# Altium PCB BrushlessDriver.PcbDoc (part 1 of 2)
Units mm, origin at the board's own origin, x right, y up, seen from the top; angles counter-clockwise.
Board outline 27.94 x 39.37 mm, 4 copper layers (Component Side, Ground Plane, Power Plane, Solder Side), stack 0.844 mm thick; 77 components, 59 nets, 274 pads, 183 vias.
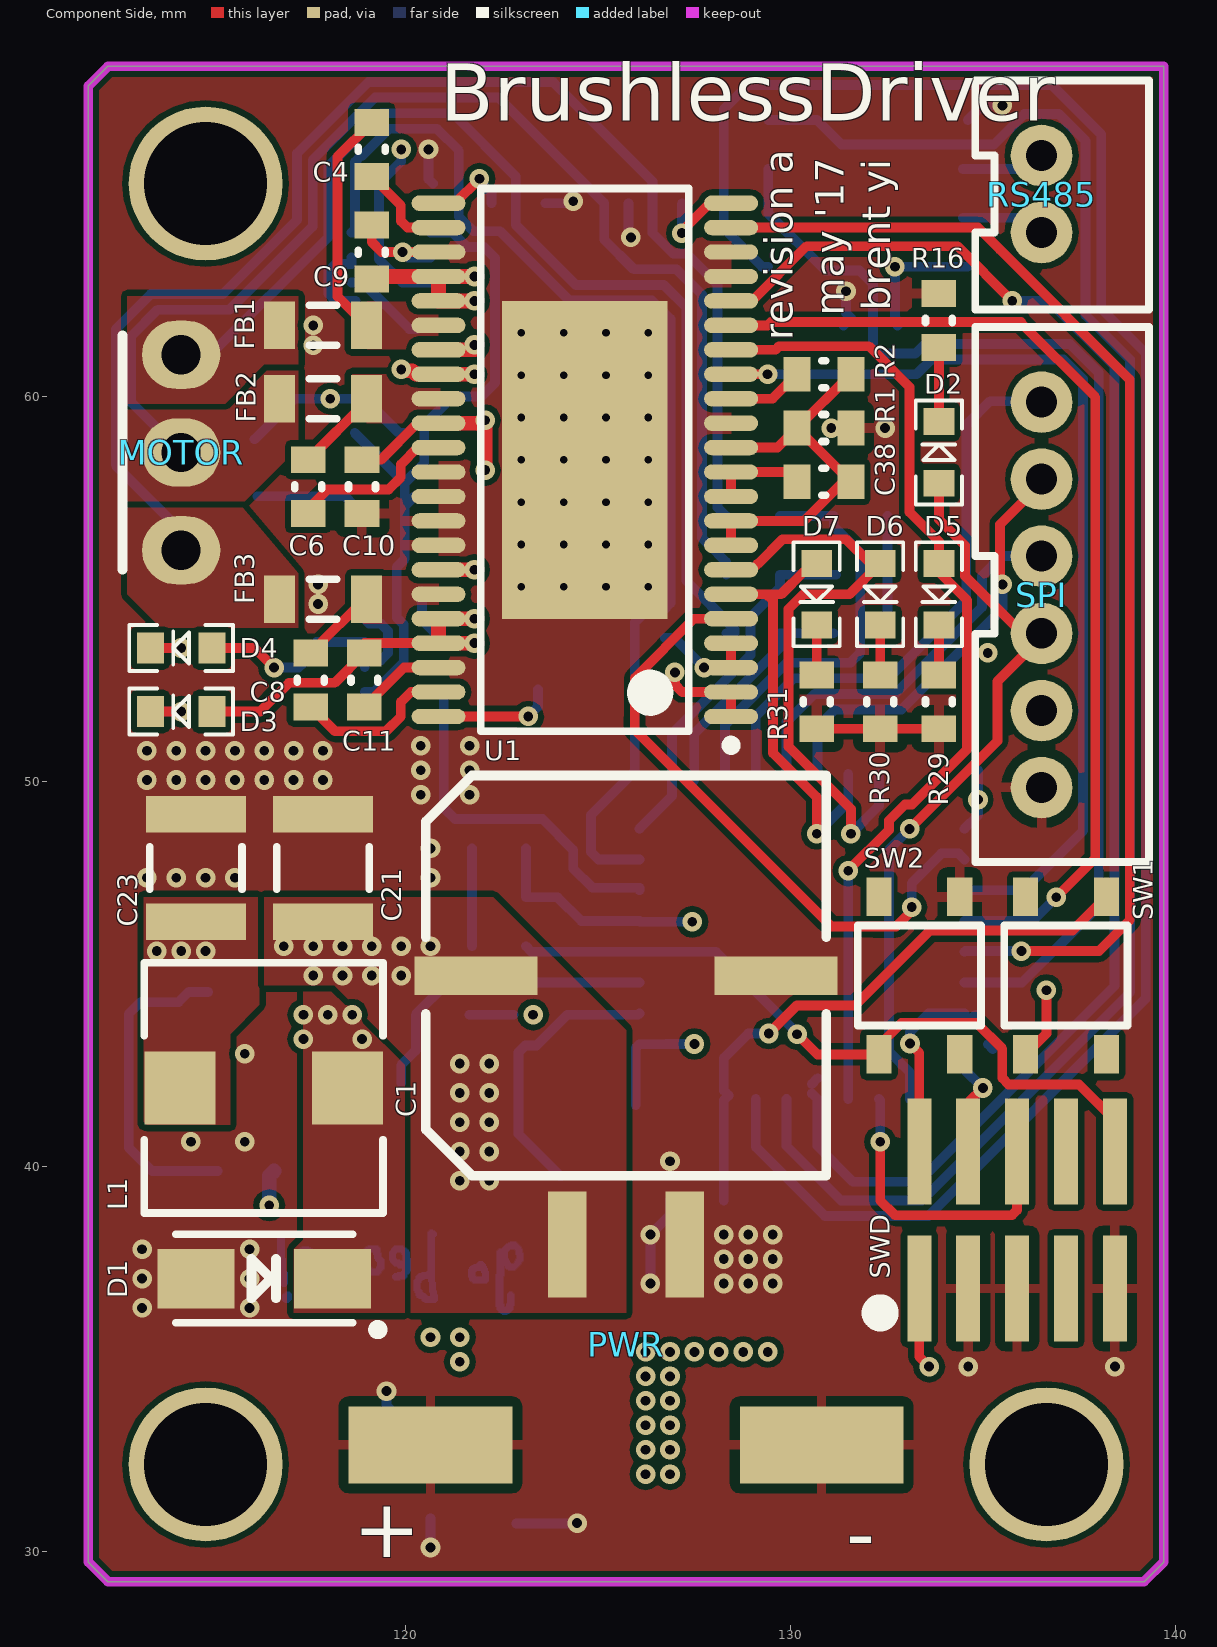
[diagram p0: Component Side view]
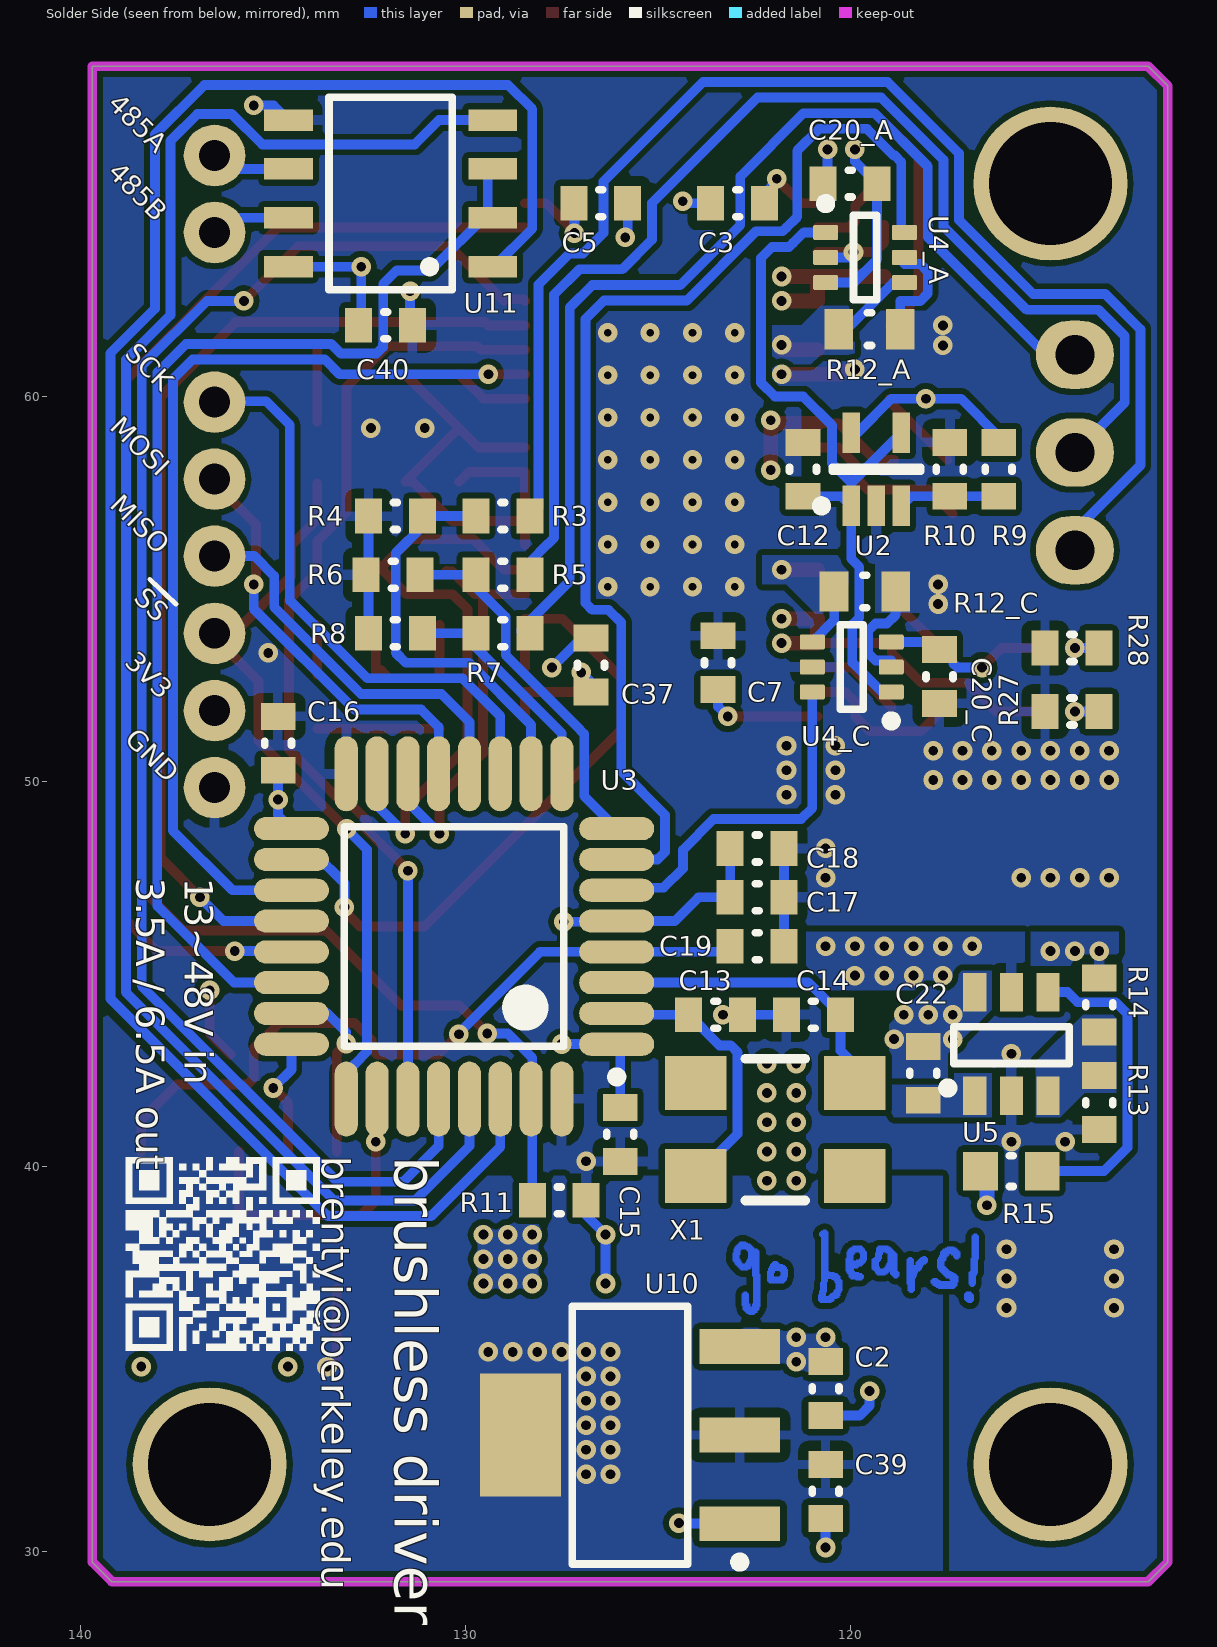
[diagram p1: Solder Side view, seen from below]
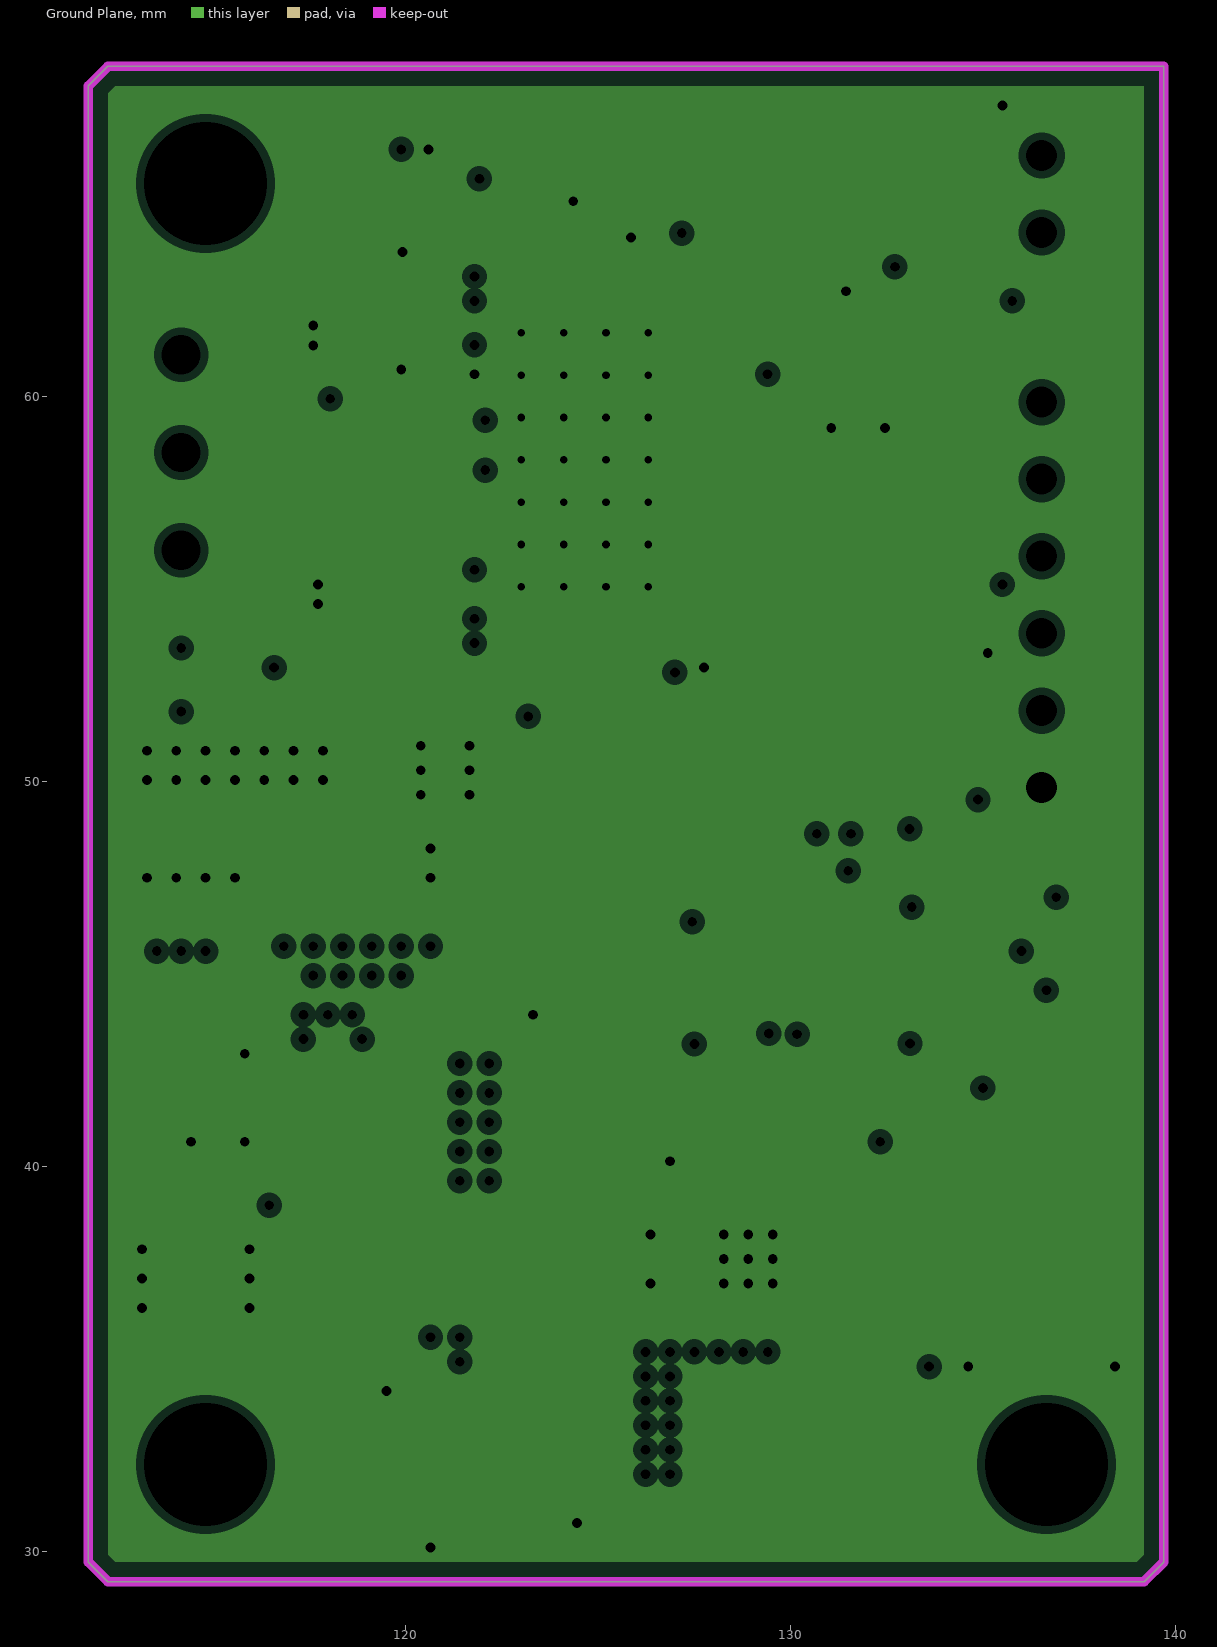
[diagram p2: Ground Plane, clearances drawn from the general rule]
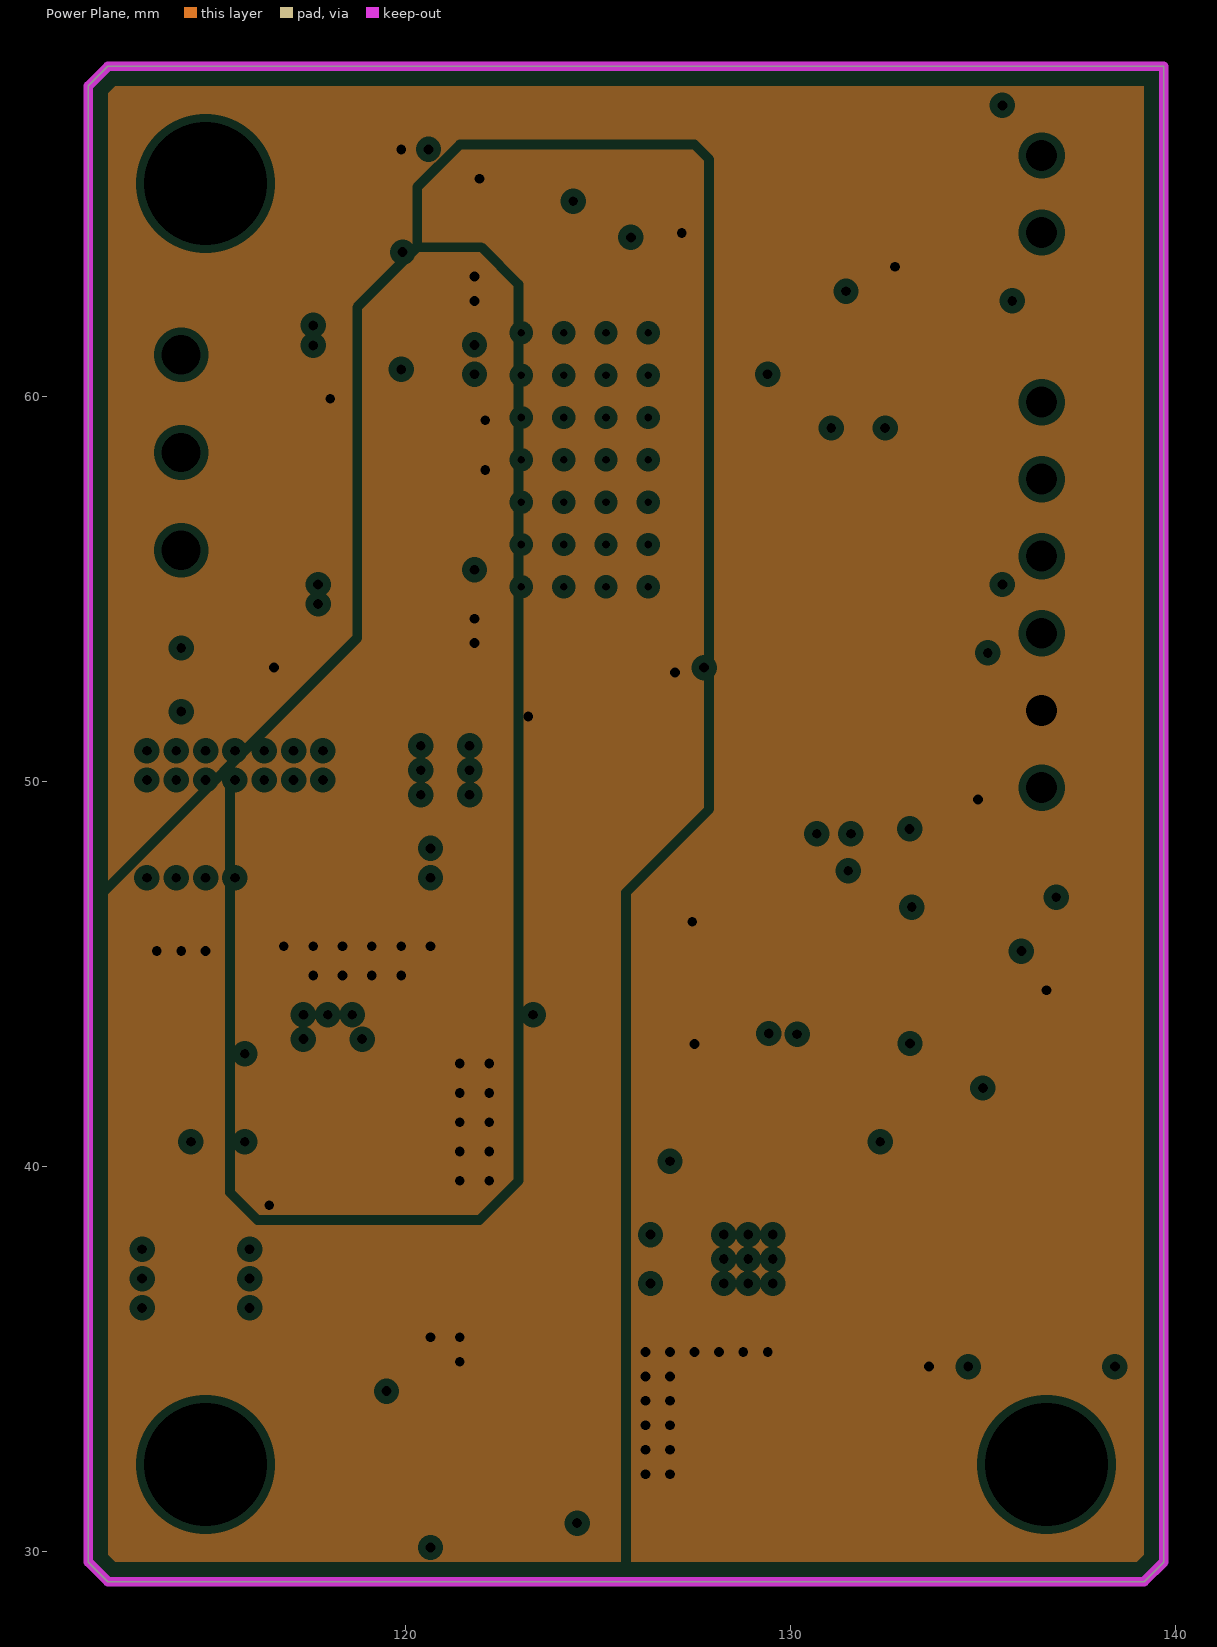
[diagram p3: Power Plane, clearances drawn from the general rule]
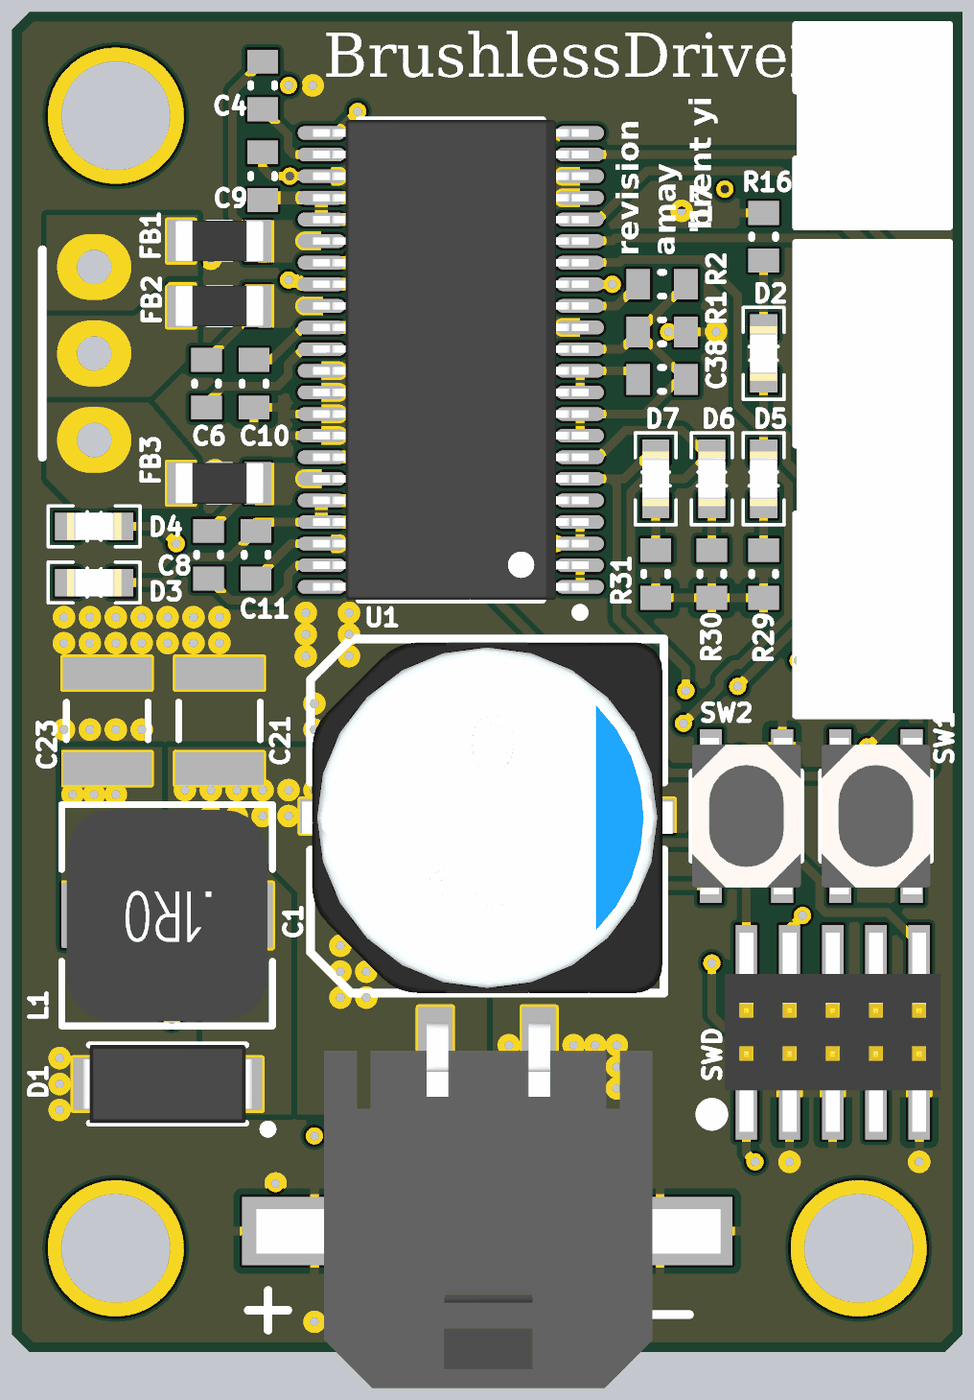
[diagram p5: 3D render of the assembled board from above, using the file's embedded part models]

## Layer stack, top to bottom
Top Solder: solder mask 0.0102, Solder Resist, Dk 3.5
Component Side: signal copper 0.0356
Dielectric 1: core 0.32, FR-4, Dk 4.8
Ground Plane: plane copper 0.036, net GND
Dielectric 3: prepreg 0.127, Dk 4.2
Power Plane: plane copper 0.036, net (Multiple Nets)
Dielectric 4: core 0.254, Dk 4.2
Solder Side: signal copper 0.0356
Bottom Solder: solder mask 0.0102, Solder Resist, Dk 3.5

## Board outline
111.76,29.718 112.268,29.21 139.192,29.21 139.7,29.718 139.7,68.58 112.268,68.58 111.76,68.072

## Design rules (kind name [scope] priority, off if disabled: settings)
Clearance [All] p1: gap=0.152 ignorepadtopadclearanceinfootprint=FALSE
PlaneClearance [All] p1: clearance=0.203
PlaneConnect [All] p1: planeconnectstyle=Direct reliefexpansion=0.508 reliefentries=4 reliefconductorwidth=0.254 reliefairgap=0.254
PolygonConnect PolygonConnectPWR [IsNamedPolygon('Power')] p1: connectstyle=Direct reliefconductorwidth=0.254 reliefentries=4 polygonreliefangle="90 Angle" airgapwidth=0.254
PolygonConnect PolygonConnectSTD [All] p2: thpad.connectstyle=Relief thpad.reliefconductorwidth=0.254 thpad.reliefentries=4 thpad.polygonreliefangle="90 Angle" thpad.airgapwidth=0.254 smdpad.connectstyle=Relief smdpad.reliefconductorwidth=0.254 smdpad.reliefentries=4 smdpad.polygonreliefangle="90 Angle" smdpad.airgapwidth=0.254 via.connectstyle=Direct via.reliefconductorwidth=0.254 via.reliefentries=4 via.polygonreliefangle="90 Angle" via.airgapwidth=0.254
RoomDefinition C [InComponentClass('C')] p1: confinementstyle=ConfineIn formatcopy=TRUE lockcomponents=FALSE outline 116.863,51.297 116.863,54.155 118.049,54.155 118.049,55.864 121.207,55.864 121.207,54.453 121.698,54.453 121.698,51.07 118.24,51.07 118.24,51.297
RoomDefinition A [InComponentClass('A')] p2: confinementstyle=ConfineIn formatcopy=TRUE lockcomponents=FALSE outline 117.896,62.133 117.896,65.516 118.586,65.516 118.586,66.361 121.444,66.361 121.444,64.703 121.354,64.703 121.354,62.133 121.088,62.133 121.088,60.823 117.93,60.823 117.93,62.133
RoomDefinition U_RS485 [InComponentClass('U_RS485')] p3: confinementstyle=ConfineIn formatcopy=TRUE lockcomponents=FALSE outline 128.498,62.424 128.498,68.132 135.408,68.132 135.408,62.424 133.509,62.424 133.509,61.02 130.651,61.02 130.651,62.424
RoomDefinition U_MCU [InComponentClass('U_MCU')] p4: confinementstyle=ConfineIn formatcopy=TRUE lockcomponents=FALSE outline 118.758,38.722 118.758,43.193 119.537,43.193 119.537,44.771 120.999,44.771 120.999,49.089 124.323,49.089 124.323,51.953 134.045,51.953 134.045,52.421 135.703,52.421 135.703,51.953 136.281,51.953 136.281,47.838 139.114,47.838 139.114,42.078 136.281,42.078 136.281,39.995 128.999,39.995 128.999,38.287 126.141,38.287 126.141,38.722
RoomDefinition U_CurrentSenseAmpBias [InComponentClass('U_CurrentSenseAmpBias')] p5: confinementstyle=ConfineIn formatcopy=TRUE lockcomponents=FALSE outline 115.327,56.681 115.327,59.539 117.402,59.539 117.402,60.364 121.26,60.364 121.26,59.539 122.065,59.539 122.065,56.681 121.26,56.681 121.26,55.856 117.402,55.856 117.402,56.681 116.597,56.681
RoomDefinition U_3V3_StepDown [InComponentClass('U_3V3_StepDown')] p6: confinementstyle=ConfineIn formatcopy=TRUE lockcomponents=FALSE outline 119.821,30.129 119.821,35.657 121.451,35.657 121.451,36.749 130.009,36.749 130.009,29.216 121.451,29.216 121.451,30.129
RoomDefinition U_Driver [InComponentClass('U_Driver')] p7: confinementstyle=ConfineIn formatcopy=TRUE lockcomponents=FALSE outline 115.927,53.708 115.927,62.878 118.297,62.878 118.297,67.85 119.955,67.85 119.955,65.935 129.688,65.935 129.688,61.408 132.301,61.408 132.301,57.725 133.255,57.725 133.255,56.518 134.762,56.518 134.762,53.21 134.687,53.21 134.687,50.641 129.688,50.641 129.688,50.435 119.63,50.435 119.63,51.205 118.105,51.205 116.708,51.205 116.708,53.708
RoomDefinition U_12V_Buck [InComponentClass('U_12V_Buck')] p8: confinementstyle=ConfineIn formatcopy=TRUE lockcomponents=FALSE outline 112.162,38.236 112.162,45.844 112.875,45.844 112.875,50.031 119.56,50.031 119.56,45.844 120.47,45.844 120.47,38.236 119.786,38.236 119.786,35.255 113.003,35.255 113.003,38.236
RoutingVias [All] p1: holewidth=0.254 width=0.508 viastyle="Through Hole" minholewidth=0.254 minwidth=0.508 maxholewidth=0.254 maxwidth=0.508
SolderMaskExpansion SolderMaskExpansionVia [IsVia] p1: expansion=0.025 soldermaskfromhole=TRUE
SolderMaskExpansion [All] p2: expansion=0.076
Width [All] p1: maxlimit=1.27 minlimit=0.254 preferedwidth=0.254
28 further rules are at their usual default settings.

## Classes and differential pairs
component class U_RS485: C40 U11
component class U_3V3_StepDown: C2 C39 U10
component class BrushlessDriver: C1 D2 D3 D4 MOTOR PWR R16 R27 R28 RS485 SPI SWD
component class A: C20_A R12_A U4_A
component class C: C20_C R12_C U4_C
component class U_12V_Buck: C21 C22 C23 D1 L1 R13 R14 R15 U5
component class U_Driver: C3 C4 C5 C6 C7 C8 C9 C10 C11 C37 C38 D5 D6 D7 FB1 FB2 FB3 R1 R2 R3 R4 R5 R6 R7 R8 R29 R30 R31 U1
component class U_MCU: C13 C14 C15 C16 C17 C18 C19 R11 SW1 SW2 U3 X1
channel class CurrentSenseLowSide: A C
component class U_CurrentSenseAmpBias: C12 R9 R10 U2

## Components (designator, comment, footprint, x,y, rotation, side; value= is the part's Value field where it differs from the comment)
C1 "100uF 63V" CAP-ELECTROLYTIC[10.0x12.6] 125.73,44.958 r90 top value=100uF
C2 "10uF" CAPC0603(1608)100_L 120.65,34.228 r90 bottom
C3 "2.2uF" CAPC0603(1608)100_L 122.936,65.024 r0 bottom
C4 "0.1uF" CAPC0603(1608)100_L 119.126,66.421 r90 top value=100nF
C5 "2.2uF" CAPC0603(1608)100_L 126.492,65.024 r180 bottom
C6 "0.1uF" CAPC0603(1608)100_L 117.475,57.658 r90 top value=100nF
C7 "2.2uF" CAPC0603(1608)100_L 123.444,53.086 r90 bottom
C8 "0.1uF" CAPC0603(1608)100_L 117.537,52.634 r90 top value=100nF
C9 "0.1uF" CAPC0603(1608)100_L 119.126,63.754 r90 top value=100nF
C10 "0.1uF" CAPC0603(1608)100_L 118.872,57.658 r270 top value=100nF
C11 "0.1uF" CAPC0603(1608)100_L 118.934,52.634 r270 top value=100nF
C12 "0.1uF" CAPC0603(1608)100_L 121.236,58.11 r270 bottom value=100nF
C13 "15pF" CAPC0603(1608)100_L 123.506,43.942 r180 bottom
C14 "15pF" CAPC0603(1608)100_L 120.966,43.942 r0 bottom
C15 "0.1uF" CAPC0603(1608)100_L 125.984,40.832 r90 bottom value=100nF
C16 "0.1uF" CAPC0603(1608)100_L 134.874,50.992 r270 bottom value=100nF
C17 "0.1uF" CAPC0603(1608)100_L 122.428,46.99 r0 bottom value=100nF
C18 "2.2uF" CAPC0603(1608)100_L 122.428,48.26 r180 bottom
C19 "0.1uF" CAPC0603(1608)100_L 122.428,45.72 r0 bottom value=100nF
C20_A "0.1uF" CAPC0603(1608)100_L 120.015,65.532 r0 bottom value=100nF (schematic designator C20)
C20_C "0.1uF" CAPC0603(1608)100_L 117.692,52.726 r270 bottom value=100nF (schematic designator C20)
C21 "4.7uF" CAPC1210(3225)280_L 117.856,47.752 r270 top
C22 "0.1uF" CAPC0603(1608)100_L 118.11,42.418 r90 bottom value=100nF
C23 "22uF" CAPC1210(3225)210_L 114.554,47.752 r270 top
C37 "0.1uF" CAPC0603(1608)100_L 126.746,53.024 r90 bottom value=100nF
C38 "0.1uF" CAPC0603(1608)100_L 130.872,57.785 r0 top value=100nF
C39 "10uF" CAPC0603(1608)100_L 120.65,31.558 r90 bottom
C40 "0.1uF" CAPC0603(1608)100_L 132.08,61.849 r0 bottom value=100nF
D1 "B160-13-F" DO-214AC 116.332,37.084 r180 top
D2 "LED_0603_GREEN_5mA" LED0603 133.858,58.547 r90 top
D3 "LED_0603_ORANGE_5mA" LED0603 114.173,51.816 r180 top
D4 "LED_0603_GREEN_5mA" LED0603 114.173,53.467 r180 top
D5 "LED_0603_BLUE_5mA" LED0603 133.858,54.864 r270 top
D6 "LED_0603_BLUE_5mA" LED0603 132.334,54.864 r270 top
D7 "LED_0603_BLUE_5mA" LED0603 130.683,54.864 r270 top
FB1 "MPZ2012S300A" 0805-Ferrite 117.856,61.849 r180 top
FB2 "MPZ2012S300A" 0805-Ferrite 117.856,59.944 r180 top
FB3 "MPZ2012S300A" 0805-Ferrite 117.856,54.737 r180 top
L1 "100uH" WE-PD-XS-PB 116.316,42.04 r180 top
MOTOR "MotorConnector" MOTORCONNECTOR 114.173,61.087 r270 top
PWR "MOLEX_MICROFIT_2_SMD_HORZ" MOLEX-MICROFIT-2-SMD-HORZ 125.73,33.147 r0 top
R1 "1R" RESC0603(1608)_L 130.872,59.182 r0 top value="1.00 Ohm"
R2 "39K" RESC0603(1608)_L 130.872,60.579 r0 top value="39000.00 Ohm"
R3 "39K" RESC0603(1608)_L 129.032,56.896 r180 bottom value="39000.00 Ohm"
R4 "2K4" RESC0603(1608)_L 131.826,56.896 r180 bottom value="2400.00 Ohm"
R5 "39K" RESC0603(1608)_L 129.032,55.372 r180 bottom value="39000.00 Ohm"
R6 "2K4" RESC0603(1608)_L 131.888,55.372 r180 bottom value="2400.00 Ohm"
R7 "39K" RESC0603(1608)_L 129.032,53.848 r180 bottom value="39000.00 Ohm"
R8 "2K4" RESC0603(1608)_L 131.826,53.848 r180 bottom value="2400.00 Ohm"
R9 "39K" RESC0603(1608)_L 116.156,58.11 r90 bottom value="39000.00 Ohm"
R10 "39K" RESC0603(1608)_L 117.426,58.11 r270 bottom value="39000.00 Ohm"
R11 "10K" RESC0603(1608)_L 127.57,39.116 r0 bottom value="10000.00 Ohm"
R12_A "0.002" 0805-SHUNT 119.509,61.752 r0 bottom (schematic designator R12)
R12_C "0.002" 0805-SHUNT 119.628,54.935 r0 bottom (schematic designator R12)
R13 "2K8" RESC0603(1608)_L 113.538,41.656 r90 bottom value="2800.00 Ohm"
R14 "39K" RESC0603(1608)_L 113.538,44.196 r90 bottom value="39000.00 Ohm"
R15 "100K" RESC0603(1608)_N 115.824,39.878 r0 bottom value="100000.00 Ohm"
R16 "150" RESC0603(1608)_L 133.858,61.976 r270 top value="150.00 Ohm"
R27 "10K" RESC0603(1608)_L 114.249,51.816 r0 bottom value="10000.00 Ohm"
R28 "150" RESC0603(1608)_L 114.249,53.467 r180 bottom value="150.00 Ohm"
R29 "150" RESC0603(1608)_L 133.858,52.07 r90 top value="150.00 Ohm"
R30 "150" RESC0603(1608)_L 132.334,52.07 r90 top value="150.00 Ohm"
R31 "150" RESC0603(1608)_L 130.683,52.07 r90 top value="150.00 Ohm"
RS485 "JST_PH_2_VERT" JST-PH-2-PTH-VERT 136.525,65.262 r270 top
SPI "JST_PH_6_VERT" JST-PH-6-PTH-VERT 136.525,54.855 r270 top
SW1 "BOOT" SWITCH 137.16,44.958 r270 top
SW2 "RESET" SWITCH 133.35,44.958 r90 top
SWD "1.27mm SWD Connector" SWD-SMD 135.89,38.608 r90 top
U1 "DRV8312" HTSSOP-44E 124.659,58.356 r180 top
U2 "MCP6001T-I/LT" SC70-LT5_M 119.331,58.11 r90 bottom
U3 "STM32F303K8T6" STM-LQFP32_M 130.302,45.974 r0 bottom
U4_A "INA199A2DCKT" DCK0006A_L 119.625,63.612 r180 bottom (schematic designator U4)
U4_C "INA199A2DCKT" DCK0006A_L 119.969,52.974 r0 bottom (schematic designator U4)
U5 "MP2459" TSOT23-6 115.824,43.18 r90 bottom
U10 "LD1117S33TR" SOT-223_L 125.73,33.02 r0 bottom
U11 "ST3485ECDR" SOIC-8 131.953,65.278 r0 bottom
X1 "8Mhz, 10pF" ABRA-ABM3B-4_V 121.958,40.957 r0 bottom

## Footprints (in the part's own frame and the unit in brackets; to place one, negate y for a bottom-side part, rotate by r counter-clockwise, add the part's x,y. Pads: shape width x height; smd on the part's side, far side on the other; paste and mask are expansions set on the pad)
0805-Ferrite [mm] "Chip Inductor, 2-Leads, Body 2.60x1.20mm, IPC High Density"
  rect 0.8x1.24 smd: 1(-1.13,0) 2(1.13,0)
  silkscreen extent -0.35,-0.52 0.35,0.52, body extent -1.3,-0.6 1.3,0.6, height 0.6
0805-SHUNT [mm] "Chip Resistor, 2-Leads, Body 2.00x1.10mm, IPC High Density"
  rect 0.75x1.05 smd: 1(-0.8,0) 2(0.8,0)
  silkscreen extent -0.05,-0.43 0.05,0.43, body extent -1,-0.55 1,0.55, height 0.32
ABRA-ABM3B-4_V [mil] "SMT Crystal, 4-Leads, Body 5.2x3.4mm"
  rect 63x55 smd: 1(-81.5,-47.5) 2(-81.5,47.5) 2(81.5,-47.5) 3(81.5,47.5)
  silkscreen extent -30,-72 30,72, body extent -114,-52 113,51, height 39
CAP-ELECTROLYTIC[10.0x12.6] [mm]
  rect 1x3.2 smd: 1(0,3.9) 2(0,-3.9)
  silkscreen extent -5.2,-5.2 5.2,5.2, body extent -5.2,-5.45 5.1,5.45, height 10.2
CAPC0603(1608)100_L [mm] "Chip Capacitor, Body 1.6x0.8mm, Height 1.0mm, IPC High Density"
  rect 0.7x0.9 smd: 1(-0.7,0) 2(0.7,0)
  silkscreen extent -0.05,-0.35 0.05,0.35, body extent -0.87,-0.47 0.88,0.48, height 1
CAPC1210(3225)210_L [mm] "Chip Capacitor, Body 3.2x2.5mm, Height 2.1mm, IPC High Density"
  rect 0.95x2.6 smd: 1(-1.4,0) 2(1.4,0)
  silkscreen extent -0.55,-1.2 0.55,1.2, body extent -1.7,-1.35 1.7,1.35, height 2.1
CAPC1210(3225)280_L [mm] "Chip Capacitor, Body 3.2x2.5mm, Height 2.8mm, IPC High Density"
  rect 0.95x2.6 smd: 1(-1.4,0) 2(1.4,0)
  silkscreen extent -0.55,-1.2 0.55,1.2, body extent -1.7,-1.4 1.7,1.4, height 2.8
DCK0006A_L [mm] "SOT23, 6-Leads, Body 2.15x1.4mm, Pitch 0.65mm, IPC High Density"
  rrect25% 0.65x0.4 smd: 1(-1.025,0.65) 2(-1.025,0) 3(-1.025,-0.65) 4(1.025,-0.65) 5(1.025,0) 6(1.025,0.65)
  silkscreen extent -1.15,-1.1 0.3,1.52, body extent -1.14,-1 1.14,1, height 0.94
DO-214AC [mm] "Molded Diode, 2-Leads, Body 4.30x2.15mm, IPC Medium Density"
  rect 2x1.55 smd: 1(-1.778,0) 2(1.778,0)
  silkscreen extent -3.08,-1.15 2.3,1.45, body extent -2.52,-1.14 2.52,1.15, height 2.3
HTSSOP-44E [mm] "TSOP, 44-Leads, Body 14.00x6.10mm, Pitch 0.64mm, Thermal Pad 8.26x4.31mm, IPC Medium Density"
  oval 1.4x0.4 smd: 1(-3.8,6.667) 2(-3.8,6.032) 3(-3.8,5.397) 4(-3.8,4.762) 5(-3.8,4.127) 6(-3.8,3.492) 7(-3.8,2.857) 8(-3.8,2.222) 9(-3.8,1.587) 10(-3.8,0.952) 11(-3.8,0.317) 12(-3.8,-0.318) 13(-3.8,-0.953) 14(-3.8,-1.588) 15(-3.8,-2.223) 16(-3.8,-2.858) 17(-3.8,-3.493) 18(-3.8,-4.128) 19(-3.8,-4.763) 20(-3.8,-5.398) 21(-3.8,-6.033) 22(-3.8,-6.667) 23(3.8,-6.667) 24(3.8,-6.032) 25(3.8,-5.397) 26(3.8,-4.762) 27(3.8,-4.127) 28(3.8,-3.492) 29(3.8,-2.857) 30(3.8,-2.222) 31(3.8,-1.587) 32(3.8,-0.952) 33(3.8,-0.317) 34(3.8,0.318) 35(3.8,0.953) 36(3.8,1.588) 37(3.8,2.223) 38(3.8,2.858) 39(3.8,3.493) 40(3.8,4.128) 41(3.8,4.763) 42(3.8,5.398) 43(3.8,6.033) 44(3.8,6.667)
  rect 4.31x8.26 smd: 45(0,0)
  silkscreen extent -3.93,-7.05 2.7,7.54, body extent -4.05,-7.05 4.05,7.05, height 1.2
JST-PH-2-PTH-VERT [mm]
  round 1.6 hole 0.8: 1(-1,0) 2(1,0)
  silkscreen extent -2.95,-1.72 3,2.79, body extent -2.95,-1.7 2.95,2.8, height 6
JST-PH-6-PTH-VERT [mil]
  round 63 hole 31.5: 1(-196.85,0) 2(-118.11,0) 3(-39.37,0) 4(39.63,0) 5(118.63,0) 6(197.37,0)
  silkscreen extent -274,-68 274,110, body extent -274,-67 274,110, height 236
LED0603 [mm]
  rect 0.7x0.8 smd: A(-0.8,0) C(0.8,0)
  silkscreen extent -1.35,-0.6 1.35,0.6, body extent -0.8,-0.4 0.8,0.4, height 0.75
MOLEX-MICROFIT-2-SMD-HORZ [mm] "Micro-Fit 3.0™ Right Angle Header, 3.00mm Pitch, Single Row, 2 Circuits, with Solder Tab, Tin, Glow Wire Capable, Black"
  rect 4.25x2 smd: 0(-5.08,-0.381) 0(5.08,-0.381)
  rect 1x2.75 smd: 1(1.524,4.826) 2(-1.524,4.826)
  body extent -6.79,-4.99 6.86,5.75, height 5.64
MOTORCONNECTOR [mil]
  oval 70x80 hole 40: 1(0,0) 2(100,0) 3(200,0)
  silkscreen extent -20,-60 220,-60
RESC0603(1608)_L [mm] "Chip Resistor, Body 1.6x0.8mm, IPC High Density"
  rect 0.7x0.9 smd: 1(-0.7,0) 2(0.7,0)
  silkscreen extent -0.05,-0.35 0.05,0.35, body extent -0.85,-0.47 0.85,0.47, height 0.6
RESC0603(1608)_N [mm] "Chip Resistor, Body 1.6x0.8mm, IPC Medium Density"
  rect 0.9x1 smd: 1(-0.8,0) 2(0.8,0)
  silkscreen extent -0.05,-0.4 0.05,0.4, body extent -0.85,-0.47 0.85,0.47, height 0.6
SC70-LT5_M [mm] "SOT353, 5-Leads, Body 2x1.3mm, Pitch 0.65mm, Lead Span 2.1mm, IPC Low Density"
  rect 1.05x0.45 smd: 1(-0.95,0.65) 2(-0.95,0) 3(-0.95,-0.65) 4(0.95,-0.65) 5(0.95,0.65)
  silkscreen extent -1.07,-1.15 0.05,1.55, body extent -0.67,-1.12 0.68,1.13, height 1.1
SOIC-8 [mm] "SOIC, 8-Leads, Body 4.90x3.90mm, Pitch 1.27mm, IPC Medium Density"
  rect 1.27x0.56 smd: 1(-2.655,1.905) 2(-2.655,0.635) 3(-2.655,-0.635) 4(-2.655,-1.905) 5(2.654,-1.905) 6(2.654,-0.635) 7(2.654,0.635) 8(2.654,1.905)
  silkscreen extent -1.6,-2.5 1.6,2.5, body extent -3.1,-2.51 3.1,2.49, height 1.75
SOT-223_L [mm] "SOT223, 4-Leads, Body 6.5x3.5mm, Pitch 2.3mm, Lead Span 7mm, IPC High Density"
  rect 2.1x0.9 smd: 1(-2.85,2.3) 2(-2.85,0) 3(-2.85,-2.3)
  rect 2.1x3.2 smd: 4(2.85,0)
  silkscreen extent -2.97,-3.35 1.5,3.42, body extent -1.85,-3.35 1.85,3.35, height 1.8
STM-LQFP32_M [mm] "QFP, 32-Leads, Body 7x7mm, Pitch 0.8mm, IPC Low Density"
  oval 1.95x0.6 smd: 1(-4.225,2.8) 2(-4.225,2) 3(-4.225,1.2) 4(-4.225,0.4) 5(-4.225,-0.4) 6(-4.225,-1.2) 7(-4.225,-2) 8(-4.225,-2.8) 17(4.225,-2.8) 18(4.225,-2) 19(4.225,-1.2) 20(4.225,-0.4) 21(4.225,0.4) 22(4.225,1.2) 23(4.225,2) 24(4.225,2.8)
  oval 0.6x1.95 smd: 9(-2.8,-4.225) 10(-2,-4.225) 11(-1.2,-4.225) 12(-0.4,-4.225) 13(0.4,-4.225) 14(1.2,-4.225) 15(2,-4.225) 16(2.8,-4.225) 25(2.8,4.225) 26(2,4.225) 27(1.2,4.225) 28(0.4,4.225) 29(-0.4,4.225) 30(-1.2,4.225) 31(-2,4.225) 32(-2.8,4.225)
  silkscreen extent -4.35,-2.85 2.85,3.77, body extent -3.5,-3.5 3.5,3.5, height 1.6
SWD-SMD [mm]
  rect 2.75x0.625 smd: 1(-1.778,2.54) 2(1.778,2.54) 3(-1.778,1.27) 4(1.778,1.27) 5(-1.778,0) 6(1.778,0) 7(-1.778,-1.27) 8(1.778,-1.27) 9(-1.778,-2.54) 10(1.778,-2.54)
  silkscreen extent -2.51,3.46 -2.31,3.66, body extent -2.92,-3.17 2.92,3.18, height 5.96
SWITCH [mm]
  rect 1x0.65 smd: 1(-2.05,1.05) 2(2.05,1.05) 3(-2.05,-1.05) 4(2.05,-1.05)
  silkscreen extent -1.3,-1.6 1.3,1.6, body extent -2.3,-1.6 2.3,1.6, height 2.5
TSOT23-6 [mm] "SOT23, 6-Leads, Body 2.90x2.80mm, Pitch 0.95mm, IPC Medium Density"
  rect 1x0.6 smd: 1(-1.35,0.95) 2(-1.35,0) 3(-1.35,-0.95) 4(1.35,-0.95) 5(1.35,0) 6(1.35,0.95)
  silkscreen extent -1.27,-1.5 0.45,1.78, body extent -1.5,-1.5 1.5,1.5, height 1
WE-PD-XS-PB [mm] "SMD Inductor, 2-Leads, Body 5.9 x 6.2 mm"
  rect 1.85x1.9 smd: 1(-2.175,0) 2(2.175,0)
  silkscreen extent -3.1,-3.25 3.1,3.25, body extent -2.95,-3.1 2.95,3.1, height 3.29

## Part data
C1: library part CAP_100uF_63V_20%, "100uF 63V 20%", Manufacturer=Nichicon, PartNumber=PCR1J101MCL1GS, Tolerance=20%, Voltage=63V, Mounting Technology="Surface Mount", PackageDescription=10x12.7mm, PackageReference=1H
C2 C39: library part CMP-1035-02797-1, "CAP 10uF 6.3V ±20% 0603 (1608 Metric) Thickness 1mm SMD", Case-EIA=0603, Case-Metric=1608, Rated Voltage="6.3 V", Tolerance=±20%, Max Thickness="1 mm", Technology=SMT
C3 C5 C7 C18: library part CMP-1035-02767-1, "CAP 2.2uF 25V ±10% 0603 (1608 Metric) Thickness 1mm SMD", Case-EIA=0603, Case-Metric=1608, Rated Voltage="25 V", Tolerance=±10%, Max Thickness="1 mm", Technology=SMT
C4 C6 C8 C9 C10 C11 C12 C15 C16 C17 C19 C20_A C20_C C22 C37 C38 C40: library part CMP-1035-02595-1, "CAP 100nF 100V ±10% 0603 (1608 Metric) Thickness 1mm SMD", Case-EIA=0603, Case-Metric=1608, Rated Voltage="100 V", Tolerance=±10%, Max Thickness="1 mm", Technology=SMT
C13 C14: library part CMP-1035-00674-1, "CAP 15pF 25V ±1% 0603 (1608 Metric) Thickness 1mm SMD", Case-EIA=0603, Case-Metric=1608, Rated Voltage="25 V", Tolerance=±1%, Max Thickness="1 mm", Technology=SMT
C21: library part CMP-1038-02163-1, "CAP 4.7uF 50V ±20% 1210 (3225 Metric) Thickness 2.8mm SMD", Case-EIA=1210, Case-Metric=3225, Rated Voltage="50 V", Tolerance=±20%, Max Thickness="2.8 mm", Technology=SMT
C23: library part CMP-1038-02278-1, "CAP 22uF 16V ±20% 1210 (3225 Metric) Thickness 2.05mm SMD", Case-EIA=1210, Case-Metric=3225, Rated Voltage="16 V", Tolerance=±20%, Max Thickness="2.05 mm", Technology=SMT
D2 D4: Manufacturer="Lite-On Inc.", PartNumber=LTST-C193TGKT-5A, Mounting Technology="Surface Mount", PackageDescription="0603 (1608 Metric)", PackageReference=0603
D3: Manufacturer="Lite-On Inc.", PartNumber=LTST-C193KFKT-5A, Mounting Technology="Surface Mount", PackageDescription="0603 (1608 Metric)", PackageReference=0603
D5 D6 D7: Manufacturer="Lite-On Inc.", PartNumber=LTST-C193TBKT-5A, Mounting Technology="Surface Mount", PackageDescription="0603 (1608 Metric)", PackageReference=0603
L1: library part CMP-0227-00265-1, "SMD-Shielded Power Inductor WE-PD, L = 100 µH", Inductance="100 µH", ComponentLink1Description="Manufacturer Link", ComponentLink1URL=http://www.we-online.com, ComponentLink2Description=Datasheet, ComponentLink2URL=http://www.we-online.de/katalog/media/pdf/744778520.pdf, DatasheetVersion="ver 2, Oct-2004", PackageDescription="SMD Inductor, 2-Leads, Body 5.9 x 6.2 mm", PackageReference=WE-PD-XS-PB, PackageVersion=2004
PWR: Manufacturer=Molex, PartNumber=43650-0212, Mounting Technology="Surface Mount", PackageReference=Microfit-3.0mm
R1: library part CMP-1012-00002-1, "1R 0.1W 5% 0603 (1608 Metric)  SMD", Case-EIA=0603, Case-Metric=1608, Power="0.1 W", Tolerance="5 %", Technology=SMT
R2 R3 R5 R7 R9 R10 R14: library part CMP-1012-00689-1, "39K 0.1W 1% 0603 (1608 Metric)  SMD", Case-EIA=0603, Case-Metric=1608, Power="0.1 W", Tolerance="1 %", Technology=SMT
R4 R6 R8: library part CMP-1012-00551-1, "2K4 0.1W 1% 0603 (1608 Metric)  SMD", Case-EIA=0603, Case-Metric=1608, Power="0.1 W", Tolerance="1 %", Technology=SMT
R11 R27: library part CMP-1012-00623-1, "10K 0.1W 1% 0603 (1608 Metric)  SMD", Case-EIA=0603, Case-Metric=1608, Power="0.1 W", Tolerance="1 %", Technology=SMT
R12_A R12_C: library part PMR10EZPFV2L00
R13: library part CMP-1012-00559-1, "2K8 0.1W 1% 0603 (1608 Metric)  SMD", Case-EIA=0603, Case-Metric=1608, Power="0.1 W", Tolerance="1 %", Technology=SMT
R15: library part CMP-1012-00736-1, "100K 0.1W 1% 0603 (1608 Metric)  SMD", Case-EIA=0603, Case-Metric=1608, Power="0.1 W", Tolerance="1 %", Technology=SMT
R16 R28 R29 R30 R31: library part CMP-1012-00415-1, "150R 0.1W 1% 0603 (1608 Metric)  SMD", Case-EIA=0603, Case-Metric=1608, Power="0.1 W", Tolerance="1 %", Technology=SMT
RS485: Manufacturer="JST Sales America, Inc.", PartNumber=B2B-PH-K-S(LF)(SN), Mounting Technology="Through Hole", PackageReference=JST-PH
SPI: Manufacturer="JST Sales America Inc.", PartNumber=B6B-PH-K-S(LF)(SN), Mounting Technology="Through Hole", PackageReference=JST-PH
SW1 SW2: library part DIPT-DTSM-6, "Switch, SPNO Push Button SMD", Manufacturer=Diptronics, PartNumber=DTSM-61NT/R, ComponentLink1Description="Manufacturer URL", ComponentLink1URL=http://www.dip.com.tw/, ComponentLink2Description=Datasheet, ComponentLink2URL=http://www.dip.com.tw/Products_tact.htm, ComponentLink3Description="Package Specification", ComponentLink3URL=http://www.dip.com.tw/PDF/pro_tact/DTSM_G_-6_2_-V.pdf, Mechanical Life="200,000 cycles", Mounting Technology="Through Hole", PackageDescription="Switch, Through-Hole, 4 Leads, Body 8.5x8.5mm, Row Spacing 9.0mm, Pitch 4.5mm", PackageReference=DTSM-6, Packing Type=Tape&Reel
SWD: library part SWD, Manufacturer=Samtec, PartNumber=FTSH-105-01-F-DV, Mounting Technology=SMD, PackageReference=Header-1.27mm-2x5
U2: library part CMP-0187-00457-2, "1 MHz, Low-Power Operational Amplifier, 5-Pin SC-70, Industrial Temperature, Tape and Reel", Code_IPC=SOT353-5, ComponentLink1Description="Manufacturer URL", ComponentLink1URL=http://www.microchip.com/, ComponentLink2Description=Datasheet, ComponentLink2URL=http://ww1.microchip.com/downloads/en/DeviceDoc/21733j.pdf, ComponentLink3Description="Package Specification", ComponentLink3URL=http://www.microchip.com/stellent/groups/techpub_sg/documents/packagingspec/en012702.pdf, DatasheetVersion="revJ, Nov-2009", PackageDescription="5-Lead Plastic Small Outline Transistor (LT) [SC70]", PackageReference=SC70-LT5, PackageVersion="revBB, Aug-2009", RevisionNote="URLs added."
U3: library part CMP-0537-00040-1, "ARM Cortex-M4 32-bit MCU, 64 KB Flash, 16 KB Internal RAM, 25 I/Os, 32-Pin LQFP, -40 to 85 degC, Tray", I/Os (High Current)=25, Operating Frequency(F) (Processor speed) (MHz)=72, Package Description="32-Pin Low Profile Quad Flat Package, 7 x 7 mm Body, 0.8 mm Pitch", Package Reference=LQFP32, Supply Voltage(Vcc) min (V)=2, ComponentLink1Description="Manufacturer URL", ComponentLink1URL=http://www.st.com/, ComponentLink2Description=Datasheet, ComponentLink2URL=http://www.st.com/st-web-ui/static/active/en/resource/technical/document/datasheet/DM00092070.pdf, Core="ARM Cortex-M4", D/A Converter=3, DatasheetVersion="Rev. 4", FLASH Size (Prog) (kB)=64, Internal RAM Size (kB)=16, Mounting Technology="Surface Mount", Packing=Tray
U4_A U4_C: library part CMP-0704-00045-2, "Voltage Output, High or Low Side Measurement, Bi-Directional Zero-Drift Series, 2.7 to 26 V, -40 to 125 degC, 6-pin SOT23 (DCK6), Green (RoHS & no Sb/Br)", Quiescent Current (+/-)(Typ)(mA)=0.065, Rating=Catalog, CMRR(Min)(dB)=100, Code_JEDEC=MO-203, Common Mode Range(Max)(V)=26, Common Mode Range(Min)(V)=-0.3, ComponentLink1Description="Manufacturer URL", ComponentLink1URL=http://www.ti.com/, ComponentLink2Description=Datasheet, ComponentLink2URL=http://www.ti.com/general/docs/lit/getliterature.tsp?genericPartNumber=INA199A2&fileType=pdf, ComponentLink3Description="Package Specification", ComponentLink3URL=http://www.ti.com/lit/ds/symlink/ina212-q1.pdf, DatasheetVersion=SBOS469D, Eco-Plan="Green (RoHS & no Sb/Br)", Gain(V/V)=100, Input Offset (+/-)(Max)(uV)=150, Input Offset Drift (+/-)(Max)(uV/Degrees Celsius)=0.5, Mounting Technology="Surface Mount", Output Type=Voltage, PackageDescription="6-Pin Plastic Small Outline, Body 2 x 1.25 mm, Pitch 0.65 mm", PackageReference=DCK0006A, PackageVersion="4093553-4/G, 01/2007", PartNumber=INA199A2DCKT, Small-Signal Bandwidth(Typ)(MHz)=0.03, SubFamily="Current Shunt Monitor", Vs(Max)(V)=26, Vs(Min)(V)=2.7
U5: Supplier Part Number 1=1589-1121-1-ND, Supplier 1=Digikey, Supplier 2=Mouser, Supplier Part Number 2=946-MP2459GJP
U10: library part CMP-0244-00310-1, "Fixed Low Drop Positive Voltage Regulator, 3.3V, 4-Pin SOT-223, Tape and Reel", ComponentLink1Description="Manufacturer URL", ComponentLink1URL=http://www.st.com, ComponentLink2Description=Datasheet, ComponentLink2URL=http://www.st.com/internet/com/TECHNICAL_RESOURCES/TECHNICAL_LITERATURE/DATASHEET/CD00000544.pdf, DatasheetVersion=1/11/2011, PackageDescription="4-Pin SOT-223 Package, 6.5 x 3.5 mm Body, 2.3 mm Pitch, 7 mm Lead Span", PackageReference=SOT-223, PackageVersion=2010
U11: "3.3 V powered, 15 kV ESD protected, up to 12 Mbps RS-485/  RS-422 transceiver 0 to 70", Manufacturer=STMicroelectronics, Mounting Technology="Surface Mount", PackageDescription=SOIC-8, PackageReference=SOIC-8, PartNumber=ST3485ECDR
X1: library part ABRA-ABM3B-4
D1: Supplier 1=Digikey

## Free pads (board coordinates)
  round 4 hole 3.2: 2(114.808,32.258) 2(114.808,65.532) 2(136.652,32.258)

## Via types
v1: diameter 0.508, hole 0.254, Component Side to Solder Side, 155 vias
v2: diameter 0.5, hole 0.2, Component Side to Solder Side, 28 vias

## Nets (pads, with @x,y where several pads share a name; then routed paths per layer and width w, separated by ;. In a path a pad name is that pad's centre, name@x,y a point inside that pad or via, vN(x,y) a via of type N, cw(c..) or ccw(c..) an arc to the next point about the centre after c; other vN are vias at no path point)
3V3: C15.2 C16.2 C17.2 C18.1 C20_A.1 C20_C.1 C39.2 C40.2 D4.A R9.2 SPI.5 SW1.4 SWD.1 U2.5 U3.1 U3.5 U3.17 U4_A.3 U4_C.3 U10.2 U10.4 U11.8 | length 31.7
  Component Side w0.254: D4.A@114.973,53.467 116.078,53.467 v1(116.586,52.959) ; SWD.1@133.35,36.83 133.35,35.052 v1(133.604,34.798) ; SW1.4@136.11,42.908 136.652,43.45 v1(136.652,44.577)
  Solder Side w0.254: R9.2@116.078,58.888 117.134,59.944 v1(118.045,59.944) ; v1(116.586,52.959) 117.225,52.959 117.334,53.068 ; C20_C.1@117.692,53.426 117.692,53.624 U4_C.3@118.944,53.624 ; v1@118.045,59.822 v1(118.045,59.944) ; v1(119.888,66.421) 119.888,66.105 C20_A.1@119.315,65.532 119.315,63.565 119.918,62.962 U4_A.3@120.65,62.962 ; U2.5@119.981,59.06 119.826,59.06 118.942,59.944 v1(118.045,59.944) ; C18.1@123.128,48.26 C17.2@123.128,46.99 123.952,46.99 124.568,46.374 U3.5@126.077,46.374 126.096,46.355 v1(127.452,46.355) ; C15.2@125.984,41.594 125.984,43.081 U3.1@126.077,43.174 126.771,43.174 126.765,43.18 v1(127.508,43.18) ; C40.2@132.78,61.849 132.842,61.911 132.715,62.038 v1(132.715,63.373) U11.8@134.607,63.373 ; U3.17@134.527,48.774 134.874,49.121 v1(134.874,49.53) C16.2@134.874,50.292
  other v1: 126.238,32.004 126.873,32.004 126.238,32.639 126.873,32.639 126.238,33.274 126.873,33.274 126.238,33.909 126.873,33.909 126.238,34.544 126.873,34.544 126.238,35.179 126.873,35.179 127.508,35.179 128.143,35.179 128.778,35.179 129.413,35.179
12V: C2.2 C3.1 C5.1 C7.1 C23.2 C37.1 L1.2 R14.2 U1.1 U1.2 U1.22 U1.23 U1.44 U10.3 | length 10.7
  Component Side w0.254: U1.44@120.859,51.689 v1(123.19,51.689) ; U1.23@120.859,65.024 121.287,65.024 v1(121.92,65.656) ; v1(127,52.832) 127,52.512 127.188,52.324 U1.2@128.459,52.324 U1.1@128.459,51.689 ; v1(127.176,64.247) 127.176,64.284 127.916,65.024 U1.22@128.459,65.024
  Solder Side w0.254: v1(121.92,65.656) 121.92,65.594 122.236,65.278 C3.1@122.236,65.024 ; v1(123.19,51.689) 123.444,51.943 C7.1@123.444,52.386 ; C37.1@126.746,52.324 126.746,52.578 v1(127,52.832) ; v1(127.176,64.247) 127.176,65.008 C5.1@127.192,65.024
  other v1: 121.412,34.925 120.65,35.56 121.412,35.56 113.538,45.593 114.173,45.593 114.808,45.593
ADC1_IN1: U3.6 U4_C.6 | length 9.3
  Solder Side w0.254: U4_C.6@120.994,52.324 120.994,49.313 121.285,49.022 123.561,49.022 124.358,48.225 124.358,47.742 124.859,47.241 126.077,47.241 U3.6@126.077,47.174
ADC1_IN2: U3.7 U4_A.6 | length 29.8
  Solder Side w0.254: U4_A.6@118.636,64.262 U4_A.6@118.6,64.262 118.686,64.348 118.686,66.098 118.849,66.261 118.881,66.261 119.574,66.954 120.82,66.954 121.387,66.388 121.387,64.669 121.661,64.395 121.67,64.395 121.77,64.295 122.456,64.295 124.256,62.495 126.408,62.495 126.89,62.013 126.89,54.637 126.712,54.459 126.286,54.459 125.959,54.132 125.959,50.267 124.823,49.131 124.823,48.166 125.015,47.974 U3.7@126.077,47.974
ADC1_IN3: R5.1 R6.2 U3.8 | length 9.6
  Solder Side w0.254: U3.8@126.077,48.774 126.923,49.62 126.923,51.238 127.025,51.341 127.025,51.346 128.961,53.282 128.961,54.273 129.732,55.043 R5.1@129.732,55.372 R6.2@131.188,55.372
ADC1_IN4: R7.1 R8.2 U3.9 | length 6.3
  Solder Side w0.254: U3.9@127.381,49.919 127.502,50.04 U3.9@127.502,50.199 127.502,51.248 129.732,53.478 R7.1@129.732,53.848 R8.2@131.126,53.848
ADC2_IN1: R3.1 R4.2 U3.10 | length 10.8
  Solder Side w0.254: U3.10@128.302,50.199 128.302,51.473 129.915,53.086 131.559,53.086 131.817,53.344 131.817,55.938 131.126,56.629 R4.2@131.126,56.896 R3.1@129.732,56.896
GND: C1.2 C2.1 C3.2 C5.2 C7.2 C9.2 C10.2 C11.2 C12.1 C13.2 C14.2 C15.1 C16.1 C17.1 C18.2 C19.1 C20_A.2 C20_C.2 C21.1 C23.1 C37.2 C39.1 C40.1 D1.2 PWR.0 PWR.1 R1.2 R4.1 R6.1 R8.1 R10.1 R11.1 R12_A.1 R12_C.1 R13.1 R16.1 R27.2 R28.1 R29.1 R30.1 R31.1 SPI.6 SW2.4 SWD.3 SWD.5 SWD.9 U1.3 U1.4 U1.13 U1.19 U1.20 U1.25 U1.30 U1.34 U1.35 U1.36 U1.37 U1.42 U1.45 U2.2 U3.16 U3.32 U4_A.2 U4_A.5 U4_C.2 U4_C.5 U5.2 U10.1 U11.5 | length 36.2
  Component Side w0.254: C11.2@118.934,51.934 119.959,52.959 U1.42@120.859,52.959 ; C9.2@119.126,64.454 119.126,64.008 119.38,63.754 v1(119.925,63.754) U1.25@120.859,63.754 ; U1.3@128.459,52.959 U1.4@128.459,53.594 ; R31.1@130.683,51.37 R30.1@132.334,51.37 R29.1@133.858,51.37
  Component Side w0.381: v1(119.888,60.706) 119.923,60.671 120.177,60.671 120.269,60.579 U1.30@120.859,60.579 v1(121.793,60.579)
  Solder Side w0.254: U4_A.5@118.6,63.612 118.6,63.441 118.189,63.441 117.996,63.248 117.996,62.676 118.189,62.483 118.709,62.483 R12_A.1@118.709,61.752 ; R12_C.1@118.828,54.935 118.828,54.329 119.054,54.104 119.355,54.104 119.548,53.911 119.548,53.338 119.355,53.145 118.944,53.145 U4_C.2@118.944,52.974 ; v1(119.507,34.163) 119.507,33.782 119.761,33.528 C2.1@120.65,33.528 ; v1(119.925,63.754) 120.067,63.612 U4_A.2@120.65,63.612 ; v1(120.599,66.421) 120.599,65.648 C20_A.2@120.715,65.532 ; v1(120.65,30.099) C39.1@120.65,30.858 ; C14.2@121.666,43.942 C13.2@122.806,43.942 ; C19.1@121.728,45.72 C17.1@121.728,46.99 C18.2@121.728,48.26 ; U10.1@122.88,30.72 124.446,30.72 v1(124.46,30.734) ; C3.2@123.636,65.024 124.358,65.024 v1(124.358,65.075) ; C5.2@125.792,65.024 125.792,64.2 v1(125.857,64.135) ; v1(126.365,36.957) v1(126.365,38.227) 126.87,38.732 R11.1@126.87,39.116 ; C37.2@126.746,53.724 126.994,53.724 v1(127.759,52.959) ; C40.1@131.38,61.849 131.572,62.041 131.445,62.168 v1(131.445,62.738) ; R8.1@132.526,53.848 R4.1@132.526,56.896 ; U11.5@134.607,67.183 134.988,67.564 v1(135.509,67.564)
  other v1: 134.62,34.798 138.43,34.798 113.157,36.322 115.951,36.322 128.27,36.957 128.905,36.957 129.54,36.957 113.157,37.084 115.951,37.084 128.27,37.592 128.905,37.592 129.54,37.592 113.157,37.846 115.951,37.846 128.27,38.227 128.905,38.227 129.54,38.227 126.873,40.132 114.427,40.64 115.824,40.64 115.824,42.926 123.317,43.942 113.284,47.498 114.046,47.498 114.808,47.498 115.57,47.498 120.65,47.498 120.65,48.26 120.396,49.657 121.666,49.657 113.284,50.038 114.046,50.038 114.808,50.038 115.57,50.038 116.332,50.038 117.094,50.038 117.856,50.038 120.396,50.292 121.666,50.292 113.284,50.8 114.046,50.8 114.808,50.8 115.57,50.8 116.332,50.8 117.094,50.8 117.856,50.8 120.396,50.927 121.666,50.927 135.128,53.34 117.729,54.61 117.729,55.118 131.064,59.182 132.461,59.182 117.602,61.329 117.602,61.849
  other v2: 123.009,55.056 124.109,55.056 125.209,55.056 126.309,55.056 123.009,56.156 124.109,56.156 125.209,56.156 126.309,56.156 123.009,57.256 124.109,57.256 125.209,57.256 126.309,57.256 123.009,58.356 124.109,58.356 125.209,58.356 126.309,58.356 123.009,59.456 124.109,59.456 125.209,59.456 126.309,59.456 123.009,60.556 124.109,60.556 125.209,60.556 126.309,60.556 123.009,61.656 124.109,61.656 125.209,61.656 126.309,61.656
NetC4_1: C4.1 U1.24 | length 2.5
  Component Side w0.254: C4.1@119.126,65.721 119.88,64.967 119.88,64.561 120.052,64.389 U1.24@120.859,64.389
NetC4_2: C4.2 FB1.1 U1.28 | length 6
  Component Side w0.254: FB1.1@118.986,61.849 118.237,62.598 118.237,66.232 C4.2@119.126,67.121
NetC6_1: C6.1 U1.33 | length 4.4
  Component Side w0.254: C6.1@117.348,56.958 117.977,57.587 119.563,57.587 119.88,57.904 119.88,58.238 120.316,58.674 U1.33@120.859,58.674
NetC6_2: C6.2 FB2.1 U1.31 | length 2.2
  Component Side w0.254: C6.2@117.475,58.358 118.986,59.869 FB2.1@118.986,59.944
NetC8_1: C8.1 U1.43 | length 4.2
  Component Side w0.254: C8.1@117.537,51.934 118.166,51.305 119.5,51.305 119.88,51.685 119.88,52.062 120.142,52.324 U1.43@120.859,52.324
NetC8_2: C8.2 FB3.1 U1.39 | length 2.1
  Component Side w0.254: C8.2@117.537,53.334 118.999,54.796 FB3.1@118.999,54.864
NetC13_1: C13.1 U3.2 X1.3 | length 7.2
  Solder Side w0.254: X1.3@124.028,39.751 122.936,40.843 122.936,42.966 123.112,43.142 123.406,43.142 C13.1@124.206,43.942 126.045,43.942 U3.2@126.077,43.974
NetC14_1: C14.1 U3.3 X1.1 | length 8.1
  Solder Side w0.254: X1.1@119.888,42.164 119.888,42.63 120.266,43.008 C14.1@120.266,43.942 121.098,44.774 U3.3@126.077,44.774
NetC22_1: C22.1 U5.1
NetC22_2: C22.2 D1.1 L1.1 U5.6
  other v1: 117.348,43.307 118.872,43.307 117.348,43.942 117.983,43.942 118.618,43.942
NetC38_1: C38.1 U1.10 U1.11 | length 2.5
  Component Side w0.254: U1.10@128.459,57.404 U1.11@128.459,58.039 129.918,58.039 C38.1@130.172,57.785
NetC38_2: C38.2 R1.1 R2.2 U1.8 U1.9 U1.12 | length 10
  Component Side w0.254: U1.8@128.459,56.134 U1.9@128.459,56.769 130.351,56.769 131.367,57.785 C38.2@131.572,57.785 R1.1@130.175,59.182 ; U1.12@128.459,58.674 129.664,58.674 R1.1@130.172,59.182 R1.1@130.175,59.182 ; R2.2@131.572,60.579 R1.1@130.175,59.182
NetD2_C: D2.C R16.2 | length 1.9
  Component Side w0.254: D2.C@133.858,59.347 R16.2@133.858,61.276